# Altium PCB 20K Control Board V1.1.PcbDoc (part 6 of 24)
Units mm, origin at the board's own origin, x right, y up, seen from the top; angles counter-clockwise.
Board outline 132 x 260 mm, 4 copper layers (Top Layer, GND, VCC, Bottom Layer); 1384 components, 779 nets, 4515 pads, 1774 vias.
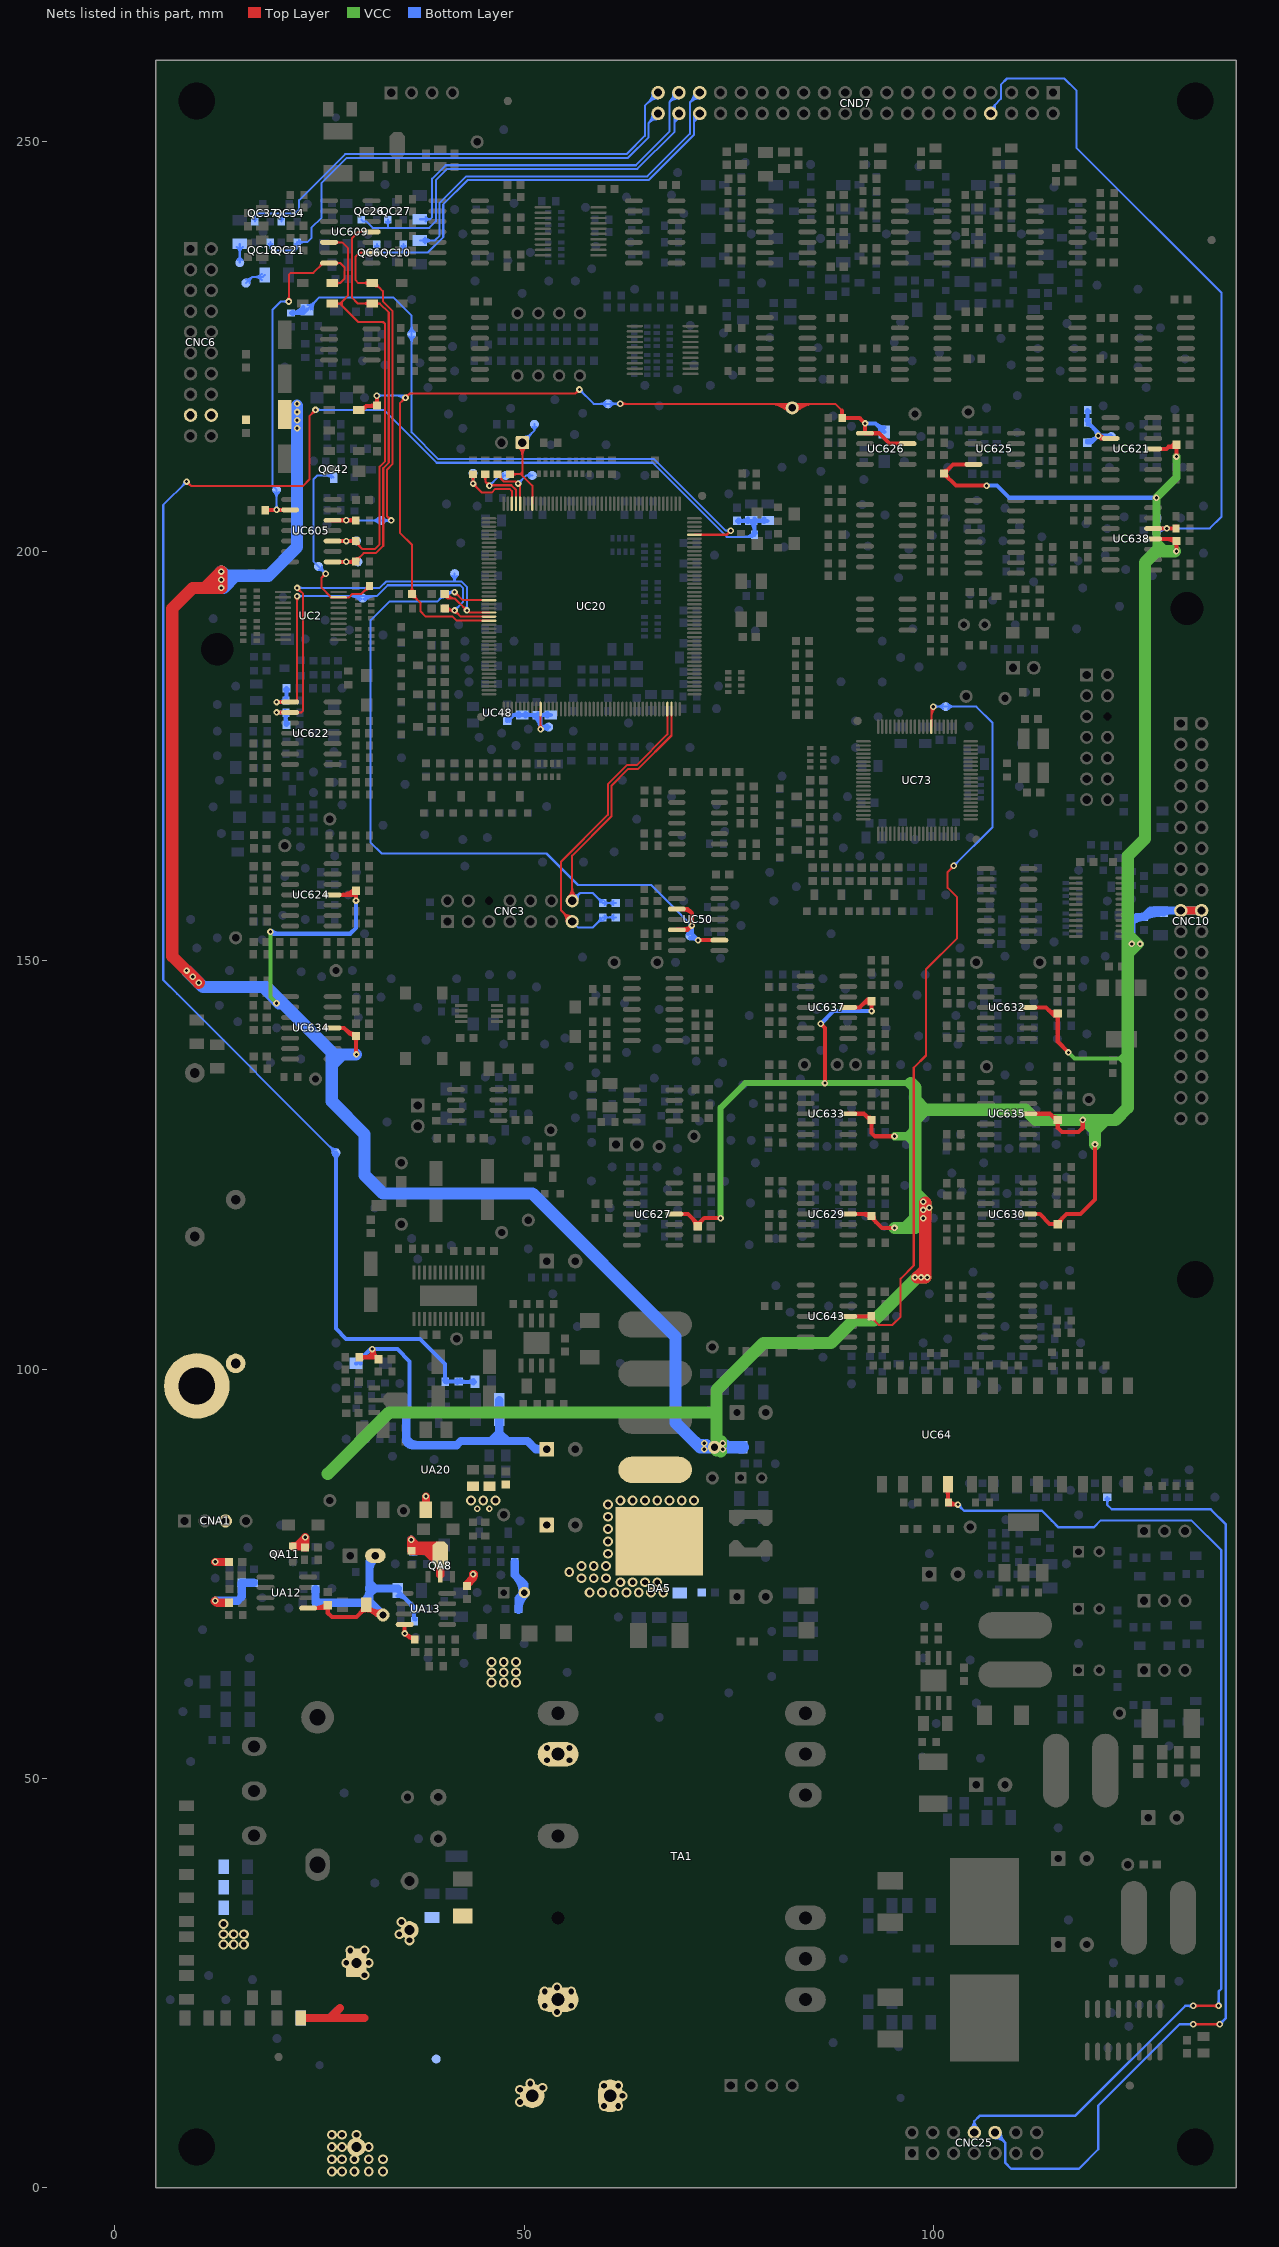
[diagram p8: the nets of this part, all layers, seen from the top]

## Via types
v1: diameter 0.8, hole 0.4, Top Layer to Bottom Layer, tented both sides, 1354 vias
v2: diameter 1.2, hole 0.7, Top Layer to Bottom Layer, 261 vias
v3: diameter 0.8, hole 0.4, Top Layer to Bottom Layer, 58 vias
v4: diameter 1.2, hole 0.7, Top Layer to Bottom Layer, tented top, 58 vias
v5: diameter 0.8, hole 0.4, Top Layer to Bottom Layer, tented top, 22 vias
v6: diameter 1.2, hole 0.7, Top Layer to Bottom Layer, tented both sides, 13 vias
v7: diameter 1.2, hole 0.7, Top Layer to Bottom Layer, tented bottom, 8 vias

## Nets (pads, with @x,y where several pads share a name; then routed paths per layer and width w, separated by ;. In a path a pad name is that pad's centre, name@x,y a point inside that pad or via, vN(x,y) a via of type N, cw(c..) or ccw(c..) an arc to the next point about the centre after c; other vN are vias at no path point) (continued)
+12V_FB: CA3.2 CA68.2 CA71.1 CA72.1 CA115.2 DA5.2 DA5.4 LA2.1 RA158.2 RA159.2 RA160.2 RA170.2 RA198.2 RA200.2 ZDA1.2 | length 61.6
  Top Layer w0.5: RA170.2@29.85,101.5 31.5,101.5 CA115.2@31.95,101.5 ; 31,101.5 31.45,101.95 v1(31.45,102.5) 31.45,102 31.45,101.7 ; 31.45,102 CA115.2@32.2,101.25 ; CA115.2@31.95,101.5 cw(c32.812,102.362) 31.599,102.485 ccw(c32.812,102.362) CA115.2@31.95,101.5 ; 31.275,101.775 ccw(c30.925,102.125) 31.328,102.413 cw(c30.925,102.125) 31.275,101.775
  Bottom Layer w0.5: ZDA1.2@29.45,100.75 29.5,100.75 31.25,102.5 v1(31.45,102.5) 34.5,102.5 36,101 RA159.2@36,94.65 ; ZDA1.2@29.55,101.2 ccw(c29.55,102.166) 30.233,101.483 ; ZDA1.2@30,100.75 cw(c31.207,100.75) 30.354,101.604 ; RA159.2@35.6,94.5 RA159.2@35.75,94.65 ; RA159.2@35.709,94.691 ccw(c35.005,95.395) 36,95.395 ; 30.853,102.103 cw(c31.45,101.505) 31.45,102.35 ccw(c31.45,101.505) 30.853,102.103
  Bottom Layer w1: RA160.2@35.551,91.443 ccw(c36.35,91.558) 36.35,90.75 RA160.2@35.6,91.5 ; RA160.2@35.565,91.415 ccw(c37.169,93.019) 37.169,90.75 ; RA160.2@35.6,91.25 RA158.2@35.6,93 RA159.2@35.6,94.5 ; 36.6,90.75 41.75,90.75 42.25,91.25 50.412,91.25 51.412,90.25 CA72.1@52.75,90.25 ; 45.95,91.25 46.95,92.25 ; 46.95,91.56 46.95,92.25 ; RA198.2@46.95,96.25 RA200.2@46.95,94 46.95,92.25 ; 47.95,91.25 46.95,92.25 ; 51.081,90.581 ccw(c51.799,91.299) CA72.1@52.481,90.546 ; CA72.1@52.467,89.967 ccw(c51.784,89.284) 51.784,90.25 ccw(c51.784,91.216) CA72.1@52.467,90.533
  other v2: 58,72.75 59.5,72.75 61,72.75 62.5,72.75 64,72.75 65.5,72.75 67,72.75 61.75,74 63.25,74 64.75,74 66.25,74 57,74.5 58.5,74.5 60,74.5 57,76 58.5,76 60,76 61.75,84 63.25,84 64.75,84 66.25,84 67.75,84 69.25,84 70.75,84
  other v4: 55.5,75.25 60.25,77.5 60.25,79 60.25,80.5 60.25,82 60.25,83.5
-12V: -12V.1 CC8.1 CC15.1 CC17.1 CC20.1 CC62.1 CC72.2 CC76.1 CC88.1 CC90.2 CC177.1 CC276.1 CC280.1 CC319.1 CC322.2 CC323.1 CNA1.3 CNC6.17 CNC6.18 CNC10.19 CNC10.20 EC6.2 LA7.2 UC621.11 UC624.11 UC625.4 UC627.11 UC629.11 UC630.11 UC632.11 UC633.11 UC634.11 UC635.11 UC637.11 UC638.11 | length 755
  Top Layer w0.5: UC634.11@26.6,141.75 28,141.75 28.75,141 ; UC624.11@26.6,158 28.95,158 CC17.1@29.45,158.5 v1(29.45,157.3) ; UC624.11@27.639,158 ccw(c27.639,160.311) CC17.1@29.273,158.677 ; 28.255,141.495 ccw(c29.45,142.69) CC90.2@29.45,141 ; 28.846,158 ccw(c28.846,159.104) 29.627,158.323 ccw(c30.054,157.896) 29.45,157.896 ccw(c28.846,157.896) CC17.1@29.273,158.323 ; CC90.2@29.214,140.669 ccw(c28.75,140.51) 28.75,141 ; CC90.2@29.25,141 28.75,141 ; CC90.2@29.273,140.573 cw(c28.846,140.146) 29.45,140.146 cw(c30.054,140.146) CC90.2@29.627,140.573 ; v1@29.45,138.55 CC90.2@29.45,140.75 ; 29.45,138.983 ccw(c29.983,138.983) v1@29.606,138.606 ; UC627.11@68.35,119 70,119 CC8.1@71.25,117.75 ; 70.561,118.439 cw(c69.622,117.5) CC8.1@70.95,117.5 ; CC8.1@71.2,117.5 71.2,117.7 72,118.5 v1(74,118.5) ; CC8.1@71.45,117.5 cw(c72.536,117.5) 71.768,118.268 ; v1(86.25,142.25) 86.75,141.75 v1@86.75,135.25 ; UC629.11@89.6,119 92.2,119 CC88.1@92.45,118.75 92.45,118.55 93.7,117.3 v1(95.25,117.3) ; UC633.11@89.6,131.25 91.5,131.25 92.25,130.5 CC72.2@92.45,130.5 ; UC637.11@89.6,144.25 91,144.25 91.75,145 CC177.1@92.45,145 v1(92.45,143.8) ; 91.243,119 cw(c91.243,117.543) CC88.1@92.273,118.573 ; 91.4,144.65 cw(c91.952,144.098) CC177.1@92.329,144.781 ; 91.682,131.068 ccw(c92.45,131.836) CC72.2@92.45,130.75 ; 91.682,144.932 cw(c92.45,144.164) CC177.1@92.45,145.25 ; 91.87,145.12 cw(c92.286,144.703) CC177.1@92.571,145.219 ; CC72.2@92.273,130.323 cw(c91.846,129.896) 92.45,129.896 cw(c93.054,129.896) CC72.2@92.627,130.323 ; CC177.1@92.273,145.177 cw(c91.846,145.604) 91.846,145 cw(c91.846,144.396) 92.273,144.823 cw(c91.846,144.396) 92.45,144.396 cw(c93.054,144.396) CC177.1@92.627,144.823 ; CC72.2@92.45,130.3 CC72.2@92.45,130.5 ; CC88.1@92.7,118.75 ccw(c93.786,118.75) 93.018,117.982 ; v1(95.25,128.5) 92.85,128.5 92.45,128.9 CC72.2@92.45,130.5 ; CC76.1@101.3,209.25 cw(c101.3,208.767) CC76.1@101.641,209.109 ; CC76.1@101.3,209.75 ccw(c101.3,210.354) 101.727,209.927 ccw(c102.154,209.5) 101.55,209.5 ccw(c102.274,209.5) 101.762,208.988 ; UC625.4@104.9,210.595 102.395,210.595 CC76.1@101.3,209.5 101.3,209.45 102.75,208 v1(106.5,208) ; UC630.11@111.6,119 113,119 114.2,117.8 CC62.1@115.2,117.8 ; UC635.11@111.6,131.25 114.25,131.25 CC15.1@115,130.5 ; UC632.11@111.6,144.25 113.75,144.25 114.5,143.5 CC20.1@115.2,143.5 115.2,140.05 v1(116.5,138.75) ; 114.1,143.9 ccw(c114.721,144.52) CC20.1@115.094,143.726 ; 114.432,131.068 ccw(c115.2,131.836) CC15.1@115.2,130.75 ; 114.476,117.8 cw(c114.476,117.026) CC62.1@115.023,117.573 ; 114.603,143.397 ccw(c115.042,143.836) CC20.1@115.306,143.274 ; CC15.1@115,130.25 CC15.1@115.2,130.25 ; CC15.1@115.023,130.323 cw(c114.596,129.896) 115.2,129.896 cw(c115.804,129.896) CC15.1@115.377,130.323 ; CC20.1@115.023,143.677 cw(c114.596,144.104) 114.596,143.5 cw(c114.596,142.896) 115.023,143.323 cw(c114.596,142.896) 115.2,142.896 cw(c115.804,142.896) CC20.1@115.377,143.323 ; CC62.1@115.2,117.75 CC62.1@115.2,117.8 ; CC15.1@115.2,130.5 CC15.1@115.2,130.25 ; CC62.1@115.225,117.775 CC62.1@115.2,117.8 ; CC62.1@115.45,117.75 cw(c116.504,117.75) 115.759,118.495 ; v1(118.25,130.5) 118.25,129.5 117.75,129 115.7,129 115.2,129.5 CC15.1@115.2,130.25 ; v1(119.75,127.5) 119.75,120.75 118,119 116.264,119 115.2,117.936 CC62.1@115.2,117.8 ; UC621.11@126.6,212.5 UC621.11@126.85,212.5 128.5,212.5 128.75,212.75 ; UC638.11@126.85,201.5 129.7,201.5 v1(129.7,200) ; 128.493,201.5 cw(c128.493,200.043) 129.523,201.073 cw(c129.096,200.646) 129.7,200.646 cw(c130.304,200.646) CC280.1@129.877,201.073 ; CC276.1@129.494,213.142 cw(c128.75,213.652) 128.75,212.75 ; CC276.1@129.523,212.823 cw(c129.096,212.396) 129.7,212.396 cw(c130.304,212.396) CC276.1@129.877,212.823 ; v1(129.7,211.55) CC276.1@129.7,213 ; CC276.1@129.7,212.75 128.75,212.75
  Top Layer w1: CNC10.19@130.23,156.07 CNC10.20@132.77,156.07
  Top Layer w1.5: v1(10.25,147.25) 7,150.5 7,193 9.5,195.5 v1(13,195.5) v1(13,197.5) ; 11,195.5 v1(13,197.5) ; 11.89,196.39 cw(c13,195.281) v1@13,196.85 ; 12,195.5 v1(13,196.5) ; v1@12.654,196.448 cw(c13.869,196.631) v1(13,197.5) ; v1@98,111.25 99,111.25 99,112.25 ; v1@98.084,111.334 99,112.25 ; v1@99,120.4 99,112.25
  VCC w0.5: v1(19,153.5) 19,145.5 v1(19.735,144.765) ; v1(116.5,138.75) 117.25,138 122.75,138 ; 123.5,137.25 122.75,138 ; 123.5,138.75 122.75,138 ; 123.75,138 122.75,138
  VCC w0.75: v1(74,118.5) 74,132 77,135 v1(86.75,135) 97.25,135
  VCC w1: v1(95.25,128.5) 96.75,128.5 ; 97.8,127.45 96.75,128.5 ; 97.8,128.5 96.75,128.5 ; 97.8,129.55 96.75,128.5 ; 123.714,153.536 cw(c122.177,152) v1@124.35,152 ; 123.75,153.5 v1(125.25,152) ; 124,150.75 v1(125.25,152) ; v1@124.191,151.919 ccw(c124.673,152.577) v1(125.25,152) ; v1(124.25,152) v1(125.25,152) ; 127.25,200.5 v1(127.25,206.525) 129.7,208.975 v1(129.7,211.55) ; 127.35,201.1 128.45,200
  VCC w1.5: 26,87.25 33.5,94.75 73.5,94.75 ; -12V.1@73.5,90.099 cw(c75.066,90.099) v1@74.015,91.26 ; -12V.1@73.5,90.5 73.5,94.75 ; -12V.1@73.5,91.216 ccw(c75.216,91.216) v1@74.003,90.003 ; 73.5,91.966 ccw(c75.216,91.966) -12V.1@74.003,90.753 ; v1(95.25,117.3) 96.6,117.3 ; 97.25,135 97.8,134.45 97.8,131.75 ; 97.8,117.55 cw(c99.202,117.55) v1@98.6,118.816 ; 97.8,118.121 cw(c100.036,118.121) v1@98.511,119.756 ; 97.8,119.051 cw(c100.199,119.051) v1@98.503,120.747 ; 97.8,119.949 ccw(c100.199,119.949) v1@98.503,118.253 ; 97.8,120.949 ccw(c100.199,120.949) v1@98.503,119.253 ; 97.8,130.55 99,131.75 ; 97.8,132.95 99,131.75 ; 98.464,117.964 ccw(c96.927,119.5) 99.1,119.5 ccw(c97.169,119.5) 98.534,120.866 ; v1@98.561,120.206 cw(c99.458,121.6) 97.8,121.6 ; v1@99,111.25 98,111.25 92.75,106 90.25,106 87.5,103.25 79.25,103.25 73.5,97.5 73.5,94.75 ; v1@118.5,130.5 119.75,129.25 ; v1(119.75,127.5) 119.75,129.25 ; 119.75,130.25 119.75,129.25 ; 121,130.5 119.75,129.25 ; 123.75,151.638 cw(c124.612,151.638) v1@124.003,152.247 ; 123.75,152.362 ccw(c124.612,152.362) v1@124.003,151.753 ; v1@129.5,200 127.25,200 125.85,198.6 125.85,164.85 123.75,162.75 123.75,153.5 123.75,132 122.25,130.5 v1(118.25,130.5) 112.5,130.5 111.25,131.75 99,131.75 ; 96.6,117.3 97.8,117.3 99,118.5 99,120.4 97.8,121.6 ; 96.6,117.3 97.8,118.5 97.8,121.6 ; 97.8,121.6 97.8,128.5 97.8,131.75 ; 97.8,131.75 99,131.75 ; 97.726,118.426 cw(c98.75,117.402) 98.75,118.85 ccw(c98.75,117.402) 97.726,118.426
  Bottom Layer w0.5: v1(19,153.5) 19.25,153.25 28.75,153.25 29.45,153.95 v1(29.45,157.3) ; v1@19.106,153.606 ccw(c19.966,154.466) 19.966,153.25 ; v1(86.25,142.25) 87.8,143.8 v1(92.45,143.8) ; v1(106.5,208) 107.75,208 109.225,206.525 v1(127.25,206.525)
  Bottom Layer w1: 17.75,146.75 19,145.5 ; v1(19.735,144.765) 19,145.5 ; v1@20,144.5 19,145.5 ; 124.128,154.628 cw(c125.75,153.006) CC323.1@125.75,155.3 ; v1@124.2,152 124.2,152.75 ; v1(124.25,152) v1@124.95,152 ; 124.325,154.825 cw(c125.512,153.638) CC323.1@125.75,155.3 ; v1(125.25,152) v1@124.95,152 ; CC323.1@125.933,155.361 cw(c127.5,152.782) CC322.2@127.5,155.8 ; CC323.1@125.97,155.52 cw(c126.924,154.566) CC322.2@127.442,155.812 ; 126.848,156.07 cw(c126.848,155.298) CC322.2@127.394,155.844 ; CC322.2@127.609,156.07 ccw(c127.609,153.441) CC323.1@125.75,155.3 ; CC322.2@128.106,155.844 cw(c128.652,155.298) 128.652,156.07 ; CNC10.20@132.77,156.07 CNC10.19@130.23,156.07 126.52,156.07 CC323.1@125.75,155.3 ; 124.2,152.75 124.2,154.7 124.8,155.3 CC323.1@125.75,155.3 ; 124.2,152.75 v1@124.95,152
  Bottom Layer w1.5: v1(8.75,148.75) 10.75,146.75 18.5,146.75 26.75,138.5 27.75,138.5 ; v1@12.948,196.846 cw(c13.131,195.631) 14,196.5 ; v1(13,195.5) v1(13,197.5) 13.5,197 ; v1@13,196.15 ccw(c13,198.323) 14.536,196.786 ; v1(13,196.5) 13,196.75 13.25,197 14.75,197 ; v1@13.25,195.5 14.75,197 ; v1@19.735,145.115 cw(c19.735,144.149) 20.418,144.832 ; 19.803,145.447 cw(c19.12,144.765) v1@20.085,144.765 ; v1@22.25,217.75 v1(22.25,215) 22.25,200.5 18.75,197 14.75,197 ; 26.5,137.25 27.75,138.5 ; 26.5,138.5 26.5,132.75 30.5,128.75 30.5,123.75 32.75,121.5 51,121.5 68.5,104 68.5,93.5 71.5,90.5 LA7.2@76.734,90.5 ; v1@29.45,138.5 27.75,138.5 ; 70.89,91.11 ccw(c72,92.219) v1@72,90.65 ; 71,91 ccw(c71.869,91.869) v1@72.052,90.654 ; 71.638,90.5 ccw(c71.638,91.362) v1@72.247,90.753 ; v1@71.753,90.753 ccw(c72.362,91.362) 72.362,90.5 ; -12V.1@73.888,90.5 ccw(c73.888,91.362) v1@74.497,90.753 ; -12V.1@74.003,90.753 ccw(c74.612,91.362) 74.612,90.5
  other v1: 72,90.25 74.25,90.25 72,91 74.25,91 97.75,111.25 98.5,111.25 99.25,111.25 98.75,118.5 98.75,119.5 99.5,119.75 98.75,120.5 29.5,138.5 9.5,148 22.25,216 22.25,217 22.25,218
ADCREF2048: CC138.2 CC147.2 CC301.1 pad.ICT@53,178.5 UC20.54 UC48.2 | length 24.7
  Top Layer w0.25: v1@51.806,178.444 ccw(c51.336,178.914) 52,178.914 ccw(c52.664,178.914) v1@52.194,178.444 ; v1(52,178.25) UC20.54@52,180.7
  Bottom Layer w0.5: UC48.2@47.925,179.25 48.675,180 CC138.2@49.75,180 ; UC48.2@47.925,179.5 ccw(c47.925,180.104) 48.352,179.677 ccw(c48.779,179.25) UC48.2@48.175,179.25 ; CC138.2@49.25,180 CC138.2@49.75,180 ; CC138.2@49.338,179.788 ccw(c48.826,179.276) 48.826,180 ccw(c48.826,180.724) CC138.2@49.338,180.212 ; CC138.2@50.162,179.788 cw(c50.674,179.276) 50.674,180 cw(c50.674,180.724) CC138.2@50.162,180.212 ; 50.776,180 cw(c50.776,179.226) CC301.1@51.323,179.773 ; CC301.1@51.326,179.771 cw(c49.782,178.178) v1@52,178.178 ; CC301.1@51.674,180.129 cw(c50.927,179.359) 52,179.359 ; v1(52,178.25) CC301.1@52,179.75 ; CC301.1@52,180 CC147.2@52.75,180 ; v1@52.106,178.144 cw(c52.966,177.284) pad.ICT@52.966,178.5 ; v1@52.25,178.5 pad.ICT@53,178.5 ; pad.ICT@52.788,178.288 ccw(c52.276,177.776) 52.276,178.5 ccw(c52.276,179.224) pad.ICT@52.788,178.712 ; CC147.2@53.25,180 CC138.2@49.75,180 ; 52.326,180 ccw(c52.326,180.724) 52.838,180.212 cw(c52.326,180.724) 52.326,180 ; 52.326,180 cw(c52.326,179.276) 52.838,179.788 ccw(c52.326,179.276) 52.326,180 ; CC301.1@51.677,179.773 cw(c52.224,179.226) 52.224,180 ccw(c52.224,179.226) CC301.1@51.677,179.773
AUX.SHUT: CA121.2 CA122.2 CC248.2 CC249.2 CC349.2 pad.ICT@27,126.5 RA187.1 RC381.1 | length 245
  Top Layer w0.25: v1@8.75,208.225 cw(c8.75,207.561) 9.219,208.031 cw(c9.689,208.5) v1@9.025,208.5 ; v1(8.75,208.5) 9.3,207.95 22.95,207.95 23.75,208.75 23.75,216.5 v1(24.5,217.25) ; v1@24.225,217.25 cw(c23.561,217.25) 24.031,216.781 cw(c24.5,216.311) v1@24.5,216.975
  Bottom Layer w0.25: 6.25,147.25 7.608,145.892 ; v1@8.475,208.5 cw(c7.811,208.5) 8.281,208.031 cw(c8.75,207.561) v1@8.75,208.225 ; v1(8.75,208.5) 5.9,205.65 5.9,147.6 7.608,145.892 ; v1(24.5,217.25) 32.864,217.25 39.314,210.8 65.7,210.8 74.75,201.75 77.9,201.75 RC381.1@78.15,202 ; v1@24.694,217.056 cw(c25.164,216.586) 25.164,217.25 cw(c25.164,217.914) v1@24.694,217.444 ; pad.ICT@26.575,126.5 ccw(c25.549,126.5) 26.274,127.226 ccw(c27,127.951) pad.ICT@27,126.925 ; pad.ICT@27,126.5 7.608,145.892 ; 76.883,201.75 ccw(c76.883,203.217) RC381.1@77.92,202.18 ; 77.486,201.75 ccw(c77.486,202.614) RC381.1@78.097,202.003 ; CC248.2@79.7,203.75 CC248.2@79.75,203.75
  Bottom Layer w0.5: pad.ICT@26.788,126.288 cw(c26.276,125.776) 27,125.776 cw(c27.724,125.776) pad.ICT@27.212,126.288 ; pad.ICT@27,126.5 27,105 28.25,103.75 37.25,103.75 40.35,100.65 RA187.1@40.35,98.5 ; RA187.1@40.209,98.691 ccw(c39.867,99.033) 40.35,99.033 ccw(c40.833,99.033) 40.491,98.691 ccw(c40.833,99.033) 40.833,98.55 ccw(c40.833,98.067) RA187.1@40.491,98.409 ; RA187.1@40.4,98.55 CA122.2@42,98.55 ; CA122.2@41.823,98.373 ccw(c41.396,97.946) 41.396,98.55 ccw(c41.396,99.154) CA122.2@41.823,98.727 ; CA122.2@42.05,98.5 CA121.2@44,98.5 ; CA122.2@42.177,98.727 ccw(c42.724,99.274) 42.724,98.5 ; CA121.2@43.788,98.288 ccw(c43.276,97.776) 43.276,98.5 ccw(c43.276,99.224) CA121.2@43.788,98.712 ; CC249.2@76,203.7 CC248.2@79.7,203.7 ; CC249.2@76.177,203.523 cw(c76.604,203.096) 76.604,203.7 cw(c76.604,204.304) CC249.2@76.177,203.877 ; 76.705,203.7 ccw(c76.705,204.595) CC349.2@77.338,203.962 ; 76.946,203.7 cw(c76.946,203.146) CC349.2@77.338,203.538 ; CC349.2@77.738,203.538 cw(c76.743,202.543) 78.15,202.543 ; RC381.1@78.009,202.191 ccw(c77.667,202.533) 78.15,202.533 ccw(c78.633,202.533) RC381.1@78.291,202.191 ; RC381.1@78.15,202 CC349.2@78.15,203.35 ; CC349.2@78.162,203.538 cw(c78.554,203.146) 78.554,203.7 ; CC349.2@78.162,203.962 ccw(c78.795,204.595) 78.795,203.7 ; 78.705,203.7 ccw(c78.705,204.595) CC248.2@79.338,203.962 ; 78.946,203.7 cw(c78.946,203.146) CC248.2@79.338,203.538
AUX_OK: DC32.1 pad.ICT@36.25,226.5 RC337.1 UC20.128 | length 90.5
  Top Layer w0.25: UC20.128@70.8,202 74.75,202 v1@75,202.25 ; v1@74.975,202.5 cw(c74.311,202.5) 74.781,202.031 cw(c75.25,201.561) v1@75.25,202.225
  Bottom Layer w0.25: DC32.1@23.45,229.5 24.95,231 34,231 36.25,228.75 36.25,222 36.25,214.5 39.5,211.25 65.886,211.25 74.636,202.5 ; DC32.1@23.55,230.075 ccw(c23.55,231.222) 24.361,230.411 ; DC32.1@23.875,229.5 cw(c24.901,229.5) 24.176,230.226 ; DC32.1@24.125,229.5 cw(c25.755,229.5) 24.602,230.652 ; pad.ICT@35.949,226.199 cw(c35.224,225.474) 36.25,225.474 cw(c37.276,225.474) pad.ICT@36.551,226.199 ; pad.ICT@35.949,226.801 ccw(c35.224,227.526) 36.25,227.526 ccw(c37.276,227.526) pad.ICT@36.551,226.801 ; v1@75.045,202.317 ccw(c74.636,201.953) 74.636,202.5 ; v1@75.045,202.683 cw(c74.636,203.047) 74.636,202.5 ; v1(75.25,202.5) 74.636,202.5
  Bottom Layer w0.5: RC337.1@21.691,228.959 cw(c22.033,228.617) 22.033,229.1 cw(c22.033,229.583) RC337.1@21.691,229.241 ; 22.588,229.1 ccw(c22.588,230.154) DC32.1@23.388,229.467 ; DC32.1@23.009,229.793 cw(c21.5,231.088) RC337.1@21.5,229.1 23.05,229.1 DC32.1@23.45,229.5
BO1QN_A: CND7.40 QC18.2 QC21.2 | length 67.6
  Bottom Layer w0.25: QC18.2@18.777,237.504 cw(c18.32,237) 19,237 ; QC18.2@19,237.75 19,237 ; QC18.2@19.223,237.504 ccw(c19.68,237) 19,237 ; QC21.2@22.027,237.504 cw(c21.57,237) 22.25,237 ; QC21.2@22.473,237.504 ccw(c22.93,237) 22.25,237 ; QC21.2@22.485,237.515 cw(c23.052,236.948) 23.052,237.75 cw(c23.052,238.552) QC21.2@22.485,237.985 ; CND7.40@65.67,253.469 cw(c64.072,253.442) 65.202,252.312 ; CND7.40@65.92,253.473 cw(c64.892,253.456) 65.619,252.729 cw(c66.346,252.002) CND7.40@66.363,253.03 ; CND7.40@66.359,252.78 ccw(c66.332,251.182) 65.202,252.312 ; CND7.40@66.37,253.48 65.202,252.312 ; 19,237 19.25,236.75 22,236.75 22.25,237 ; 22.25,237 QC21.2@22.25,237.75 23.5,237.75 24,238.25 24,239.5 25.25,240.75 25.25,245 28.3,248.05 62.686,248.05 65.202,250.566 65.202,252.312
BO1QN_K: pad.ICT@16,232.75 RC369.2 | length 6.3
  Bottom Layer w0.254: pad.ICT@16,232.75 16.75,233.5 18.05,233.5 RC369.2@18.3,233.75 ; pad.ICT@16,233.173 ccw(c16,234.194) 16.722,233.472 ccw(c17.444,232.75) pad.ICT@16.423,232.75 ; RC369.2@17.93,233.13 ccw(c17.037,232.237) 17.037,233.5 ccw(c17.037,234.763) RC369.2@17.93,233.87
BO1QP_A: CND7.36 QC6.2 QC10.2 | length 56.8
  Bottom Layer w0.25: QC6.2@31.777,237.254 cw(c31.32,236.75) 32,236.75 ; QC6.2@32,237.5 32,236.75 ; QC6.2@32.223,237.254 ccw(c32.68,236.75) 32,236.75 ; QC10.2@35.027,237.254 cw(c34.57,236.75) 35.25,236.75 ; QC10.2@35.25,237.5 35.25,236.75 ; QC10.2@35.473,237.254 ccw(c35.93,236.75) 35.25,236.75 ; CND7.36@70.98,253.48 70.75,253.25 70.75,252.499 ; CND7.36@71.45,252.95 CND7.36@71.45,253.48 70.75,252.78 70.75,252.499 ; CND7.36@71.5,253.249 70.75,252.499 ; 32,236.75 32.25,236.5 35,236.5 ; 35,236.5 38.25,236.5 40.11,238.36 40.11,242.36 43.1,245.35 65.236,245.35 70.75,250.864 70.75,252.499 ; 35,236.5 35.25,236.75
BO1QP_K: CND7.35 RC354.2 | length 53.7
  Bottom Layer w0.25: RC354.2@37.25,237.95 39.064,237.95 39.66,238.547 39.66,242.547 42.914,245.8 65.05,245.8 70.25,251 70.25,254.82 CND7.35@71.45,256.02 ; RC354.2@37.694,237.756 cw(c38.164,237.286) 38.164,237.95 cw(c38.164,238.614) RC354.2@37.694,238.144 ; RC354.2@37.871,237.579 cw(c38.767,236.683) 38.767,237.95 cw(c38.767,239.217) RC354.2@37.871,238.321 ; CND7.35@70.75,256.02 cw(c69.06,256.02) 70.255,254.825 cw(c71.45,253.63) CND7.35@71.45,255.32 ; CND7.35@71,256.02 cw(c69.914,256.02) 70.682,255.252 cw(c71.45,254.484) CND7.35@71.45,255.57
BO2QN_A: CND7.39 QC34.2 QC37.2 | length 66.8
  Bottom Layer w0.25: QC37.2@16.921,240.533 ccw(c16.728,240.845) 17.095,240.845 ; QC37.2@17.095,240.25 17.095,240.845 ; QC37.2@17.269,240.533 cw(c17.462,240.845) 17.095,240.845 ; QC34.2@20.149,240.518 ccw(c19.865,240.905) 20.345,240.905 ccw(c20.825,240.905) QC34.2@20.541,240.518 ; QC34.2@20.345,240.25 20.345,240.905 ; 20.345,241.155 20.345,240.905 ; CND7.39@65.67,256.02 cw(c63.98,256.02) 65.175,254.825 cw(c66.37,253.63) CND7.39@66.37,255.32 ; CND7.39@65.92,256.02 cw(c64.834,256.02) 65.602,255.252 cw(c66.37,254.484) CND7.39@66.37,255.57 ; CND7.39@66.37,256.02 64.75,254.4 64.75,250.75 62.5,248.5 28.114,248.5 22.5,242.886 22.5,241.782 21.968,241.25 20.69,241.25 ; 17.095,240.845 17.5,241.25 20,241.25 ; 20,241.25 20.345,240.905 ; 20,241.25 20.69,241.25 ; 20.345,240.905 20.69,241.25
BO2QN_K: pad.ICT@15.25,235.25 RC390.2 | length 5.9
  Bottom Layer w0.254: RC390.2@14.88,237.18 cw(c13.987,236.287) 15.25,236.287 cw(c16.513,236.287) RC390.2@15.62,237.18 ; pad.ICT@14.951,235.549 ccw(c14.229,236.271) 15.25,236.271 ccw(c16.271,236.271) pad.ICT@15.549,235.549 ; pad.ICT@15.25,235.25 RC390.2@15.25,237.55
BO2QP_A: CND7.38 QC26.2 QC27.2 | length 53.3
  Bottom Layer w0.25: QC26.2@30.095,240.5 30.345,240.25 30.75,240.25 31.5,239.5 38.409,239.5 39.2,240.291 39.2,245.314 40.586,246.7 63.836,246.7 68.341,251.204 68.341,251.999 ; QC27.2@33.11,240.265 cw(c32.543,239.698) 33.345,239.698 cw(c34.147,239.698) QC27.2@33.58,240.265 ; 33.345,239.595 QC27.2@33.345,240.5 ; CND7.38@68.91,252.91 68.341,252.341 68.341,251.999 ; CND7.38@68.91,253.48 68.341,252.911 68.341,252.499 ; CND7.38@69.091,253.25 68.341,252.499 ; 68.341,251.999 68.341,252.499
BO2QP_K: CND7.37 RC379.2 | length 48.4
  Bottom Layer w0.25: RC379.2@37.25,240.55 38.5,240.55 ; RC379.2@37.932,240.252 cw(c38.5,239.86) 38.5,240.55 ; RC379.2@37.932,240.848 ccw(c38.5,241.24) 38.5,240.55 ; CND7.37@68.21,256.005 cw(c66.638,255.972) 67.75,254.86 ; CND7.37@68.46,256.01 cw(c67.45,255.989) 68.164,255.274 cw(c68.879,254.56) CND7.37@68.9,255.57 ; CND7.37@68.895,255.32 ccw(c68.862,253.748) 67.75,254.86 ; CND7.37@68.91,256.02 67.75,254.86 ; 38.5,240.55 38.75,240.8 38.75,245.5 40.4,247.15 63.65,247.15 67.75,251.25 67.75,254.86
BOOST1_QN: DC39.1 pad.ICT@29.5,201.25 RC299.1 UC605.10 UC609.5 | length 57.9
  Top Layer w0.25: UC609.5@26.15,237.73 27.77,237.73 28.5,237 28.5,231.25 27.75,230.5 ; DC39.1@26.55,230.25 27.5,230.25 ; DC39.1@27.05,230.025 cw(c27.5,229.688) 27.5,230.25 ; DC39.1@27.05,230.475 ccw(c27.5,230.812) 27.5,230.25 ; UC609.5@27.074,237.606 cw(c27.372,237.308) 27.372,237.73 cw(c27.372,238.152) UC609.5@27.074,237.854 ; 27.75,230 27.75,230.5 ; RC299.1@29.4,200.875 cw(c29.4,200.332) 29.784,200.716 ; RC299.1@29.4,201.1 30.25,200.25 31.75,200.25 32.333,200.833 32.333,210.333 33,211 33,227.75 ; RC299.1@29.725,201.2 ccw(c30.751,201.2) 30.026,200.474 ; 33,227.25 33,227.75 ; 27.5,230.25 29.75,228 32.75,228 33,227.75 ; 27.5,230.25 27.75,230.5
  Top Layer w0.5: UC605.10@26.6,201.23 v1(28.25,201.23) RC299.1@29.4,201.23 ; 28.869,201.23 ccw(c28.869,201.781) RC299.1@29.259,201.391
  Bottom Layer w0.5: v1@28.27,201.25 pad.ICT@29.5,201.25 ; v1@28.356,201.124 cw(c28.66,200.82) 28.66,201.25 ; pad.ICT@29.288,201.038 ccw(c28.776,200.526) 28.776,201.25 ccw(c28.776,201.974) pad.ICT@29.288,201.462
BOOST1_QP: DC36.1 pad.ICT@29.69,198.69 RC295.1 UC605.8 UC609.11 | length 58.6
  Top Layer w0.25: RC295.1@29.34,198.69 30.4,199.75 31.886,199.75 32.783,200.646 32.783,210.146 33.45,210.814 33.45,227.75 33.45,227.936 33.45,229.164 32.364,230.25 ; RC295.1@29.4,199.125 ccw(c29.4,200.03) 30.04,199.39 ; RC295.1@29.725,198.8 cw(c30.389,198.8) 29.919,199.269 ; UC609.11@30.426,238.876 ccw(c30.128,238.578) 30.128,239 ccw(c30.128,239.422) UC609.11@30.426,239.124 ; DC36.1@30.985,229.985 ccw(c30.345,229.345) 30.345,230.25 ccw(c30.345,231.155) DC36.1@30.985,230.515 ; UC609.11@31.35,239 29.75,239 28.95,238.2 28.95,231 29.7,230.25 DC36.1@31.45,230.25 32.364,230.25 ; DC36.1@31.959,230.037 cw(c32.364,229.759) 32.364,230.25 ; DC36.1@31.959,230.463 ccw(c32.364,230.741) 32.364,230.25
  Top Layer w0.5: UC605.8@26.6,198.69 v1(28.25,198.69) RC295.1@29.34,198.69 ; 28.893,198.69 ccw(c28.893,199.207) RC295.1@29.259,198.841 ; 28.941,198.69 cw(c28.941,198.241) RC295.1@29.259,198.559
  Bottom Layer w0.5: v1(28.25,198.69) pad.ICT@29.69,198.69 ; pad.ICT@29.478,198.478 ccw(c28.966,197.966) 28.966,198.69 ccw(c28.966,199.414) pad.ICT@29.478,198.902
BOOST1_TEMP: CC267.1 CND7.8 RC448.1 RC454.1 UC638.12 | length 91.2
  Top Layer w0.5: UC638.12@126.85,202.77 v1(128.5,202.77) 129.42,202.77 RC448.1@129.65,203 ; 129.119,202.77 cw(c129.119,202.219) RC448.1@129.509,202.609
  Bottom Layer w0.25: CND7.8@107.01,253.354 CND7.8@107.01,253.48 ; CND7.8@107.07,253.48 CND7.8@107.01,253.48 ; CND7.8@107.5,253.97 107.5,254.5 ; v1(128.5,202.77) 133.77,202.77 135.2,204.2 135.2,206.2 135.2,231.55 117.5,249.25 117.5,256.25 116,257.75 109,257.75 108.25,257 108.25,255.25 107.5,254.5 ; v1@128.694,202.576 cw(c129.164,202.106) 129.164,202.77 cw(c129.164,203.434) v1@128.694,202.964 ; CND7.8@107.01,253.48 107.01,254.01 107.5,254.5
  Bottom Layer w0.5: CC267.1@127.123,202.677 ccw(c126.576,203.224) 127.35,203.224 ; RC454.1@127.209,203.809 cw(c126.867,203.467) 127.35,203.467 cw(c127.833,203.467) RC454.1@127.491,203.809 ; CC267.1@127.3,202.5 CC267.1@127.35,202.55 ; RC454.1@127.35,204 CC267.1@127.35,202.55 ; CC267.1@127.482,202.329 cw(c128.5,201.375) v1(128.5,202.77) 127.57,202.77 CC267.1@127.35,202.55
BOOST2_QN: DC40.1 pad.ICT@19.75,207.5 RC307.1 UC605.2 UC609.7 | length 51.9
  Top Layer w0.25: RC307.1@18.35,205 RC307.1@18.35,205.04 ; v1@21.056,230.694 ccw(c20.586,231.164) 21.25,231.164 ccw(c21.914,231.164) v1@21.444,230.694 ; v1(21.25,230.5) 21.25,233.75 21.5,234 24.25,234 25.44,235.19 UC609.7@26.15,235.19 27.56,235.19 28.05,234.7 28.05,233.3 27.5,232.75 ; 24.988,234.738 ccw(c24.535,235.19) UC609.7@25.175,235.19 ; DC40.1@26.55,232.75 27.5,232.75 ; DC40.1@27.05,232.525 cw(c27.5,232.188) 27.5,232.75 ; DC40.1@27.05,232.975 ccw(c27.5,233.312) 27.5,232.75 ; UC609.7@27.074,235.066 cw(c27.372,234.768) 27.372,235.19 cw(c27.372,235.612) UC609.7@27.074,235.314
  Top Layer w0.5: RC307.1@18.35,205.04 v1(19.75,205.04) UC605.2@21.4,205.04 ; RC307.1@18.491,204.909 cw(c18.809,204.591) 18.809,205.04 ; RC307.1@18.491,205.191 ccw(c18.857,205.557) 18.857,205.04
  Bottom Layer w0.25: pad.ICT@19.449,207.199 cw(c18.724,206.474) 19.75,206.474 cw(c20.776,206.474) pad.ICT@20.051,207.199 ; v1@19.556,205.234 ccw(c19.086,205.704) 19.75,205.704 ccw(c20.414,205.704) v1@19.944,205.234 ; v1(19.75,205.04) pad.ICT@19.75,207.5 19.25,208 19.25,229.5 20.25,230.5 v1(21.25,230.5) ; v1@21.056,230.306 ccw(c20.586,229.836) 20.586,230.5 ccw(c20.586,231.164) v1@21.056,230.694
BOOST2_QP: DC31.1 pad.ICT@32.5,203.75 RC302.1 UC605.12 UC609.9 | length 56.2
  Top Layer w0.25: UC609.9@30.426,236.336 ccw(c30.128,236.038) 30.128,236.46 ccw(c30.128,236.882) UC609.9@30.426,236.584 ; DC31.1@30.985,232.485 ccw(c30.345,231.845) 30.345,232.75 ccw(c30.345,233.655) DC31.1@30.985,233.015 ; UC609.9@31.35,236.46 29.86,236.46 29.4,236 29.4,233.1 29.75,232.75 DC31.1@31.45,232.75 DC31.1@31.5,232.75 ; DC31.1@31.65,232.375 cw(c31.65,231.228) 32.461,232.039 ; DC31.1@31.75,232.75 32.725,231.775 32.725,230.525 33.9,229.35 33.9,210.627 33.233,209.96 33.233,204.267 v1(33.75,203.75) ; DC31.1@32.025,232.75 ccw(c32.689,232.75) 32.219,232.281 ; v1@33.475,203.75 ccw(c32.811,203.75) 33.281,204.219 ccw(c33.75,204.689) v1@33.75,204.025
  Top Layer w0.5: UC605.12@26.6,203.77 v1(28.25,203.77) RC302.1@29.38,203.77 ; 28.869,203.77 cw(c28.869,203.219) RC302.1@29.259,203.609
  Bottom Layer w0.25: v1@28.27,203.75 v1(33.75,203.75) ; v1@28.444,203.576 cw(c28.866,203.154) 28.866,203.75 ; v1@28.444,203.964 ccw(c28.962,204.482) 28.962,203.75 ; pad.ICT@32.199,203.449 ccw(c31.474,202.724) 31.474,203.75 ccw(c31.474,204.776) pad.ICT@32.199,204.051 ; pad.ICT@32.801,203.449 cw(c33.526,202.724) 33.526,203.75 cw(c33.526,204.776) pad.ICT@32.801,204.051 ; v1@33.556,203.556 ccw(c33.086,203.086) 33.086,203.75 ccw(c33.086,204.414) v1@33.556,203.944
BOOST2_TEMP: CC274.1 pad.ICT@121.75,214 RC471.1 RC472.1 UC621.3 | length 15.6
  Top Layer w0.5: v1(120.147,214.103) 120.48,213.77 UC621.3@121.65,213.77 ; v1@120.253,214.209 ccw(c121.314,215.27) UC621.3@121.314,213.77 ; v1@120.332,213.918 ccw(c120.659,214.245) UC621.3@120.831,213.816
  Bottom Layer w0.5: RC472.1@118.709,215.941 ccw(c118.367,216.283) 118.85,216.283 ccw(c119.333,216.283) RC472.1@118.991,215.941 ; RC471.1@118.709,217.059 cw(c118.367,216.717) 118.85,216.717 cw(c119.333,216.717) RC471.1@118.991,217.059 ; CC274.1@118.8,213.25 119.293,213.25 v1(120.147,214.103) ; CC274.1@118.8,213.5 ccw(c118.8,215.294) v1@120.069,214.026 ; RC472.1@118.85,215.5 cw(c118.85,214.896) RC472.1@119.277,215.323 ; RC471.1@118.85,217.25 RC472.1@118.85,215.75 120.147,214.453 v1(120.147,214.103) ; 119.643,214.957 cw(c118.789,214.103) v1@119.997,214.103 ; 120.776,214.103 cw(c120.776,213.026) pad.ICT@121.538,213.788 ; pad.ICT@121.75,214 121.647,214.103 v1(120.147,214.103)
BOOTMODE84: CNC2.1 pad.ICT@51.25,215.5 RC212.1 UC20.169 | length 24.6
  Top Layer w0.25: RC212.1@48.4,209.4 RC212.1@48.25,209.4 49.5,209.4 ; RC212.1@48.53,209.17 cw(c49.085,208.615) 49.085,209.4 cw(c49.085,210.185) RC212.1@48.53,209.63 ; CNC2.1@49.293,212.773 cw(c48.14,211.62) 49.77,211.62 cw(c51.4,211.62) CNC2.1@50.247,212.773 ; CNC2.1@49.469,212.949 cw(c48.744,212.224) 49.77,212.224 cw(c50.796,212.224) CNC2.1@50.071,212.949 ; 49.77,209.4 49.5,209.4 ; 49.77,209.67 49.5,209.4 ; CNC2.1@49.77,213.25 49.77,209.23 51,208 UC20.169@51,205.8 ; CNC2.1@49.885,213.135 CNC2.1@50,213.25 ; 49.968,209.032 49.6,209.4 49.5,209.4
  Bottom Layer w0.25: CNC2.1@49.77,213.25 51.25,214.73 ; CNC2.1@49.77,213.675 ccw(c49.77,214.701) 50.496,213.976 ccw(c51.221,213.25) CNC2.1@50.195,213.25 ; CNC2.1@49.77,213.925 ccw(c49.77,215.555) 50.922,214.402 ccw(c52.075,213.25) CNC2.1@50.445,213.25 ; CNC2.1@50.02,213.25 CNC2.1@50.27,213.5 ; pad.ICT@51.023,215.14 cw(c50.765,214.73) 51.25,214.73 ; pad.ICT@51.25,215.5 51.25,214.73 ; pad.ICT@51.477,215.14 ccw(c51.735,214.73) 51.25,214.73
BOOTMODE85: pad.ICT@51,209.25 RC214.1 UC20.172 | length 11.3
  Top Layer w0.25: RC214.1@46.75,209.4 46.75,209.25 47.5,208.5 47.75,208.5 49,208.5 v1(49.25,208.25) 49.5,208 UC20.172@49.5,205.8 ; RC214.1@46.8,209.075 cw(c46.8,208.773) RC214.1@47.013,208.987 ; RC214.1@46.875,209.393 ccw(c47.393,209.343) RC214.1@47.025,208.975 ; RC214.1@47.124,209.369 ccw(c48.078,209.278) 47.4,208.6
  Bottom Layer w0.25: v1(49.25,208.25) 50.25,209.25 ; v1@49.25,208.525 ccw(c49.25,209.189) 49.719,208.719 ccw(c50.189,208.25) v1@49.525,208.25 ; pad.ICT@50.635,209.032 ccw(c50.25,208.801) 50.25,209.25 ; pad.ICT@50.635,209.468 cw(c50.25,209.699) 50.25,209.25 ; pad.ICT@51,209.25 50.25,209.25
BOOTMODE86: pad.ICT@47.75,209.25 RC215.1 UC20.173 | length 13.5
  Top Layer w0.25: RC215.1@45.02,209.17 cw(c44.465,208.615) 45.25,208.615 cw(c46.035,208.615) RC215.1@45.48,209.17 ; RC215.1@45.34,209.4 45.25,209.31 45.25,208.5 45.7,208.05 48.425,208.05 49,207.475 UC20.173@49,205.8 ; v1@45.475,208 ccw(c44.811,208) 45.281,208.469 ccw(c45.75,208.939) v1@45.75,208.275
  Bottom Layer w0.25: v1(45.75,208) 47,209.25 pad.ICT@47.75,209.25 ; v1@45.75,208.275 ccw(c45.75,208.939) 46.219,208.469 ccw(c46.689,208) v1@46.025,208 ; pad.ICT@47.385,209.032 ccw(c47,208.801) 47,209.25 ccw(c47,209.699) pad.ICT@47.385,209.468
BOOTMODE87: pad.ICT@43.75,209.5 RC216.1 UC20.174 | length 15.7
  Top Layer w0.25: RC216.1@43.52,209.17 cw(c42.965,208.615) 43.75,208.615 cw(c44.535,208.615) RC216.1@43.98,209.17 ; v1@43.556,208.444 ccw(c43.086,208.914) 43.75,208.914 ccw(c44.414,208.914) v1@43.944,208.444 ; v1@43.75,207.975 cw(c43.75,207.311) 44.219,207.781 cw(c44.689,208.25) v1@44.025,208.25 ; RC216.1@43.75,209.4 v1(43.75,208.25) 44.85,207.15 46.014,207.15 46.464,207.6 48.238,207.6 48.5,207.338 UC20.174@48.5,205.8
  Bottom Layer w0.25: pad.ICT@43.449,209.199 cw(c42.724,208.474) 43.75,208.474 cw(c44.776,208.474) pad.ICT@44.051,209.199 ; v1@43.556,208.444 ccw(c43.086,208.914) 43.75,208.914 ccw(c44.414,208.914) v1@43.944,208.444 ; v1(43.75,208.25) pad.ICT@43.75,209.75
BUS+: CA70.2 CA75.2 CNBA3.1 DA6.1 pad.ICT@39.25,15.75 RA110.2 RA125.1 RA173.2 TA1.8 | length 17.3
  Top Layer w1: RA125.1@22.7,20.75 26.25,20.75 ; 27.5,22 26.25,20.75 ; 30.5,20.75 26.25,20.75
  Bottom Layer w1: RA173.2@22.7,20.75 26,20.75 ; 27.25,21.75 26.25,20.75 ; 28.5,20.75 26,20.75 ; 26,20.75 26.25,20.75 ; 26,20.75 26.25,20.75
  other v2: 49.5,10.5 49.5,12 52.25,12.25 50.75,12.75 54,21.5 52.5,22.25 55.75,22.25 52.5,24 55.75,24 54,24.5 30.5,26 28.25,27.5 31,27.5 28.75,29 30.5,29 36,30.25 34.75,31 35,32.5
BUS-: BUS-.1 CA5.1 CA75.1 CA79.2 CA80.2 CA85.2 CA86.2 CA87.2 CA87a.2 CA105.1 CA106.1 CA107.2 CA108.1 CA109.1 CA110.1 CA114.1 CA117.1 CA119.1 CA120.1 CNBA3.2 LA8.1 LA9.1 pad.ICT@31.1,73.25 QA8.2 QA11.2 RA122.2 RA152.1 RA153.1 RA154.1 RA164.1 RA167.1 RA169.1 RA179.1 RA185.1 TA1.2 UA12.5 UA13.4 UA20.3 | length 109.2
  Top Layer w0.5: UA12.5@23.6,70.845 25.645,70.845 CA86.2@26,71.2 26,70.25 26.5,69.75 29.5,69.75 30.7,70.95 CA85.2@30.7,71.25 31.95,70 BUS-.1@32.75,70 ; UA12.5@24.539,70.845 ccw(c24.539,72.661) CA86.2@25.823,71.377 ; CA86.2@25.823,71.023 cw(c25.396,70.596) 26,70.596 cw(c26.604,70.596) CA86.2@26.177,71.023 ; 29.982,70.232 ccw(c29.214,71) CA85.2@30.3,71 ; CA85.2@30.103,70.353 cw(c30.7,69.755) 30.7,70.6 cw(c30.7,69.031) 31.81,70.14 ; CA85.2@31.1,70.85 ccw(c32.096,71.846) BUS-.1@32.566,70.518 ; 31.66,70.29 ccw(c32.389,71.019) BUS-.1@32.733,70.047 ; v1@35.4,67.6 cw(c35.4,66.996) 35.827,67.423 ; UA13.4@35.4,68.845 35.4,67.85 36,67.25 ; v1@35.625,67.625 ccw(c36.54,68.54) RA164.1@36.635,67.249 ; RA164.1@36.471,66.96 ccw(c36,66.722) 36,67.25 ; RA164.1@36.65,67 36.4,67.25 36,67.25
  Top Layer w1: v1@12.179,71.679 ccw(c12.612,72.112) 12.612,71.5 ; v1(12.25,71.75) 12.5,71.5 CA106.1@13.95,71.5 ; v1(12.25,76.5) CA105.1@13.95,76.5 ; QA11.2@21.75,78.405 23.045,78.405 CA120.1@23.2,78.25 ; QA11.2@22.155,78.405 v1(23.25,79.5) CA120.1@23.25,78.3 ; RA167.1@36.2,77.9 v1(36.2,79.2) 37.25,78.15 38.3,78.15 ; 36.2,78.5 38.65,78.5 ; RA167.1@36.25,77.85 38,77.85 ; UA20.3@38,82.87 v1(38,84.5) ; QA8.2@39.5,78.5 38.65,78.5 ; QA8.2@39.75,74.9 QA8.2@39.75,77.4 ; QA8.2@39.75,76.1 38,77.85 ; CA109.1@43,73.55 43,73.75 43.75,74.5 v1(43.75,75) ; 43.567,74.317 ccw(c42.884,75) v1@43.85,75 ; 38,77.85 38.65,78.5 ; 38,77.85 39.3,77.85 QA8.2@39.75,77.4 ; 38.65,78.5 QA8.2@39.75,77.4
  Bottom Layer w0.5: CA110.1@34.55,72.35 cw(c34.55,70.901) 35.574,71.926 ; CA110.1@34.55,73 34.55,72.95 36.55,70.95 CA117.1@36.55,70.75 ; 35.982,71.518 cw(c35.214,70.75) CA117.1@36.3,70.75 ; CA117.1@36.373,70.573 cw(c35.946,70.146) 36.55,70.146 cw(c37.154,70.146) CA117.1@36.727,70.573 ; RA179.1@36.55,69.55 CA117.1@36.55,71 ; 36.55,69.904 ccw(c37.204,69.904) RA179.1@36.741,69.441
  Bottom Layer w1: v1(12.25,71.75) 15,71.75 15.5,72.25 CA119.1@15.5,73.95 RA185.1@16.95,73.95 ; CA108.1@24.5,71.5 CA107.2@24.5,73.2 ; CA108.1@24.55,71.5 30.25,71.5 ; 30.7,71.95 ccw(c29.748,72.902) pad.ICT@31.052,73.238 ; 30.95,71.5 30.25,71.5 ; 31.1,72.35 30.25,71.5 ; CA87.2@31.77,77.25 31.1,76.58 RA122.2@31.1,75.25 31.1,73.9 ; BUS-.1@32.75,70 31.1,71.65 31.1,72.6 ; CA110.1@34.55,73.25 31.75,73.25 ; v1(36.2,79.2) 36.2,78 CA114.1@36.45,77.75 ; RA169.1@48.85,76.5 48.85,74.9 50.02,73.73 CA80.2@50.02,72.75 49.3,72.03 CA79.2@49.3,70.75 ; 48.986,74.764 cw(c46.971,72.75) CA80.2@49.82,72.75 ; CA79.2@49.3,70.624 cw(c52.015,70.624) CA80.2@50.157,72.604 ; 31.1,72.6 31.1,73.9 ; 31.1,72.6 31.75,73.25 ; 31.1,73.9 31.75,73.25 ; RA122.2@31.1,75.427 cw(c33.278,75.427) 31.738,76.967 ccw(c33.278,75.427) RA122.2@31.1,75.427
  other v1: 35.4,67.75
  other v2: 26.5,2 27.75,2 29.25,2 31,2 32.75,2 29.25,3.5 31,5 29.5,6.5 59.75,10 61.5,10 62,11.25 59.75,12.5 61.5,12.5 13.25,29.75 14.5,29.75 15.75,29.75 13.25,31 14.5,31 15.75,31 13.25,32.25 52.8,52.25 55.55,52.25 52.8,53.75 55.55,53.75 46,61.75 47.5,61.75 49,61.75 46,63 47.5,63 49,63 46,64.25 47.5,64.25 49,64.25 43.5,84 45,84 46.5,84
  other v3: 44.25,83 45.75,83
  other v4: 26.5,3.5 27.75,3.5 31,3.5 32.75,3.5 26.5,5 27.75,5 26.5,6.5 27.75,6.5
BUSOVP/PVOCP_OFF: pad.ICT@24.871,198.129 QC42.3 RC298.1 UC2.19 | length 30.4
  Top Layer w0.25: v1@25.475,197.25 cw(c24.811,197.25) 25.281,196.781 cw(c25.75,196.311) v1@25.75,196.975 ; v1(25.75,197.25) 25.25,196.75 25.25,195.5 26.396,194.354 28.604,194.354 29.025,194.775 30.125,194.775 RC298.1@30.943,195.593 ; 26.295,194.455 ccw(c26.479,194.64) UC2.19@26.479,194.379 ; 30.46,195.11 cw(c31.1,194.47) RC298.1@31.1,195.375 ; 30.581,195.231 ccw(c30.111,195.7) RC298.1@30.775,195.7
  Bottom Layer w0.25: pad.ICT@24.871,197.704 cw(c24.871,196.678) 25.596,197.404 cw(c26.322,198.129) pad.ICT@25.296,198.129 ; v1@25.475,197.25 ccw(c24.811,197.25) 25.281,197.719 ccw(c25.75,198.189) v1@25.75,197.525 ; 25.662,209.25 cw(c25.662,208.092) QC42.3@26.48,208.911 ; v1(25.75,197.25) 24.25,198.75 24.25,208.75 24.75,209.25 26.433,209.25 QC42.3@26.715,208.968 ; 26.165,209.25 ccw(c26.165,209.696) QC42.3@26.48,209.381 ; QC42.3@26.265,209.25 cw(c26.265,208.696) QC42.3@26.657,209.088
DSP-COM-CNTL1: CNC25.10 RC621.2 | length 127.9
  Top Layer w0.3: v1(131.75,20) v1(135,20) ; v1@131.927,19.823 cw(c132.354,19.396) 132.354,20 cw(c132.354,20.604) v1@131.927,20.177 ; v1@134.823,19.823 ccw(c134.396,19.396) 134.396,20 ccw(c134.396,20.604) v1@134.823,20.177
  Bottom Layer w0.25: 121.25,83.45 121.775,82.925 133.875,82.925
  Bottom Layer w0.3: CNC25.10@107.54,6.095 cw(c107.54,4.465) 108.692,5.618 cw(c109.845,6.77) CNC25.10@108.215,6.77 ; CNC25.10@107.54,6.395 cw(c107.54,5.49) 108.18,6.13 cw(c108.82,6.77) CNC25.10@107.915,6.77 ; CNC25.10@107.54,6.77 108.765,5.545 108.765,3.085 109.5,2.35 117.772,2.35 120.15,4.728 120.15,10.067 130.083,20 v1(131.75,20) ; RC621.2@121.038,84.188 cw(c120.526,83.676) 121.25,83.676 cw(c121.974,83.676) RC621.2@121.462,84.188 ; 121.25,83.45 RC621.2@121.25,84.4 ; v1@131.573,19.823 ccw(c131.146,19.396) 131.146,20 ccw(c131.146,20.604) v1@131.573,20.177 ; 133.9,82.9 133.95,82.85 135.75,81.05 135.75,20.75 v1(135,20) ; v1@135,20.25 ccw(c135,20.854) 135.427,20.427 ccw(c135.854,20) v1@135.25,20
DSP-STATE: pad.ICT@101.5,181 RC662.2 UC73.67 UC643.11 | length 107.1
  Top Layer w0.25: UC643.11@88.75,106.5 UC643.11@89.6,106.5 ; RC662.2@92.25,106.5 93.3,105.45 95,105.45 96,106.45 96,111.114 97.6,112.714 97.6,136.873 99.1,138.373 99.1,148.916 102.902,152.717 102.902,157.717 101.75,158.868 101.75,160.796 v1(102.5,161.546) ; RC662.2@92.4,106.125 cw(c92.4,105.582) 92.784,105.966 ; RC662.2@92.725,106.45 ccw(c93.751,106.45) 93.026,105.724 ; UC73.67@99.75,178.55 99.75,180.75 v1(100,181) ; 99.75,179.733 cw(c101.267,179.733) v1@100.194,180.806 ; 99.75,180.336 cw(c100.664,180.336) v1@100.018,180.982 ; v1@102.225,161.546 cw(c101.561,161.546) 102.031,161.076 cw(c102.5,160.607) v1@102.5,161.271
  Top Layer w0.5: UC643.11@89.6,106.5 92.15,106.5 RC662.2@92.2,106.55 ; RC662.2@92.259,106.359 ccw(c91.917,106.017) 91.917,106.5 ccw(c91.917,106.983) RC662.2@92.259,106.641
  Bottom Layer w0.25: v1(100,181) 105.25,181 107.25,179 107.25,166.296 v1(102.5,161.546) ; v1@100.194,180.806 cw(c100.664,180.336) 100.664,181 cw(c100.664,181.664) v1@100.194,181.194 ; pad.ICT@101.199,180.699 ccw(c100.474,179.974) 100.474,181 ccw(c100.474,182.026) pad.ICT@101.199,181.301 ; pad.ICT@101.801,180.699 cw(c102.526,179.974) 102.526,181 cw(c102.526,182.026) pad.ICT@101.801,181.301 ; v1@102.5,161.821 ccw(c102.5,162.484) 102.969,162.015 ccw(c103.439,161.546) v1@102.775,161.546
DSP-STATETOARM: CNC25.8 RC611.1 UC64.4 | length 141
  Top Layer w0.3: v1(131.75,22.25) v1(134.85,22.25) ; v1@131.927,22.073 cw(c132.354,21.646) 132.354,22.25 cw(c132.354,22.854) v1@131.927,22.427 ; v1@134.673,22.073 ccw(c134.246,21.646) 134.246,22.25 ccw(c134.246,22.854) v1@134.673,22.427
  Top Layer w0.5: UC64.4@101.523,85.353 cw(c100.925,84.755) 101.77,84.755 cw(c102.615,84.755) UC64.4@102.017,85.353 ; RC611.1@101.77,83.83 UC64.4@101.77,86 ; 101.77,84.476 ccw(c102.526,84.476) RC611.1@101.991,83.941 ; RC611.1@101.85,83.5 v1(103,83.5) ; RC611.1@101.991,83.841 ccw(c102.816,84.666) v1@102.816,83.5
  Bottom Layer w0.25: 119.6,80.7 120.475,81.575 131.3,81.575 131.525,81.575 135.2,77.9
  Bottom Layer w0.3: v1@103,83.25 cw(c103,82.646) 103.427,83.073 cw(c103.854,83.5) v1@103.25,83.5 ; v1(103,83.5) 103.75,82.75 113.25,82.75 114.481,81.519 115.3,80.7 119.6,80.7 ; CNC25.8@104.586,7.303 ccw(c103.927,8.15) 105,8.15 ; CNC25.8@105,6.77 105,8.15 ; CNC25.8@105.414,7.303 cw(c106.073,8.15) 105,8.15 ; v1@131.573,22.073 ccw(c131.146,21.646) 131.146,22.25 ccw(c131.146,22.854) v1@131.573,22.427 ; v1(131.75,22.25) 130.778,22.25 117.328,8.8 105.65,8.8 105,8.15 ; v1@134.673,22.427 ccw(c134.246,22.854) 134.85,22.854 ccw(c135.454,22.854) v1@135.027,22.427 ; v1(134.85,22.25) 134.85,23.989 135.2,24.339 135.2,77.9
DSP_BUSOVP: CC140.2 CC288.1 DC9.2 DC43.2 pad.ICT@60.25,218 RC110.2 TP15.1 UC20.26 UC626.1 UC626.7 | length 152
  Top Layer w0.25: v1@35.225,218.75 cw(c34.561,218.75) 35.031,218.281 cw(c35.5,217.811) v1@35.5,218.475 ; v1@35.5,219.025 ccw(c35.5,219.689) 35.969,219.219 ccw(c36.439,218.75) v1@35.775,218.75 ; CC140.2@36.035,195.015 ccw(c35.395,195.655) 36.3,195.655 ccw(c37.205,195.655) CC140.2@36.565,195.015 ; CC140.2@36.3,194.375 cw(c36.3,193.59) 36.855,194.145 ; CC140.2@36.675,194.75 ccw(c37.701,194.75) 36.976,194.024 ; UC20.26@45.7,191.5 41.75,191.5 41.25,192 37.986,192 37.305,192.682 37.305,193.695 36.3,194.7 CC140.2@36.3,194.75 36.3,200.743 34.8,202.243 34.8,218.05 v1(35.5,218.75) 36,219.25 56.25,219.25 v1(56.75,219.75) ; v1@56.475,219.75 cw(c55.811,219.75) 56.281,219.281 cw(c56.75,218.811) v1@56.75,219.475 ; v1(61.75,218) 83.5,218 87.2,218 88,218 88.85,217.15 ; v1@61.944,217.806 cw(c62.414,217.336) 62.414,218 cw(c62.414,218.664) v1@61.944,218.194 ; 79.913,218 cw(c79.913,214.663) TP15.1@82.273,217.023 ; 80.517,218 cw(c80.517,215.267) TP15.1@82.449,217.199 ; 81.12,218 cw(c81.12,215.87) TP15.1@82.626,217.376 ; 81.724,218 cw(c81.724,216.474) TP15.1@82.803,217.553 ; 81.75,218 82.25,217.5 TP15.1@82.75,217.5 83.25,217.5 83.75,218 cw(c83.477,218.273) TP15.1@83.212,217.992 ; TP15.1@82.697,217.553 cw(c83.776,216.474) 83.776,218 ; TP15.1@82.874,217.376 cw(c84.38,215.87) 84.38,218 ; TP15.1@83.041,217.81 ccw(c83.3,218.085) 83.568,217.818 ; TP15.1@83.051,217.199 cw(c84.983,215.267) 84.983,218 ; TP15.1@83.227,217.023 cw(c85.587,214.663) 85.587,218 ; TP15.1@83.425,217.5 cw(c83.847,217.5) 83.549,217.799
  Top Layer w0.5: DC43.2@30,217 30.75,217.75 ; DC43.2@30.029,217.498 ccw(c30.129,218.371) 30.75,217.75 ; 31.276,217.75 ccw(c31.276,218.524) 31.823,217.977 ccw(c31.396,218.404) 32,218.404 ccw(c32.604,218.404) CC288.1@32.177,217.977 ; CC288.1@32,217.8 v1(32,219) ; CC288.1@32.05,217.75 30.75,217.75 ; RC110.2@88.709,216.441 ccw(c88.367,216.783) 88.85,216.783 ccw(c89.333,216.783) RC110.2@88.991,216.441 ; 88.85,217.15 RC110.2@88.85,216.25 91,216.25 v1(91.65,215.6) UC626.1@91.65,214.405 93.345,214.405 94.615,213.135 UC626.7@96.85,213.135 ; RC110.2@88.991,216.109 cw(c89.333,215.767) 89.333,216.25 cw(c89.333,216.733) RC110.2@88.991,216.391
  Bottom Layer w0.25: v1(32,219) 35.25,219 v1(35.5,218.75) ; v1@32.194,218.806 cw(c32.664,218.336) 32.664,219 cw(c32.664,219.664) v1@32.194,219.194 ; 34.233,219 cw(c34.233,217.483) v1@35.306,218.556 ; 34.836,219 cw(c34.836,218.086) v1@35.482,218.732 ; v1@56.75,219.475 cw(c56.75,218.811) 57.219,219.281 cw(c57.689,219.75) v1@57.025,219.75 ; v1(56.75,219.75) 58.5,218 v1(61.75,218) ; pad.ICT@59.949,217.699 ccw(c59.224,216.974) 59.224,218 ccw(c59.224,219.026) pad.ICT@59.949,218.301 ; pad.ICT@60.551,217.699 cw(c61.276,216.974) 61.276,218 cw(c61.276,219.026) pad.ICT@60.551,218.301 ; v1@61.556,217.806 ccw(c61.086,217.336) 61.086,218 ccw(c61.086,218.664) v1@61.556,218.194
  Bottom Layer w0.5: v1(91.65,215.6) 92.95,215.6 DC9.2@94,214.55 ; 93.061,215.489 ccw(c94,216.428) DC9.2@94,215.1 ; DC9.2@93.303,215.247 cw(c92.705,214.65) DC9.2@93.55,214.65
DSP_OUTOCP: CC136.2 pad.ICT@70.25,153 UC20.21 UC50.3 UC50.5 UC50.9 | length 108.7
  Top Layer w0.25: v1@41.5,194.725 cw(c41.5,194.061) 41.969,194.531 cw(c42.439,195) v1@41.775,195 ; v1(41.5,195) 42.5,194 UC20.21@45.7,194
  Top Layer w0.5: UC50.5@68.65,153.73 69.98,153.73 v1(70.5,154.25) 70.5,155.75 69.98,156.27 UC50.3@68.65,156.27 ; UC50.5@69.45,153.78 ccw(c69.45,155.18) v1@70.44,154.19 ; UC50.3@69.45,156.22 cw(c69.45,154.82) 70.44,155.81 ; UC50.3@69.462,156.222 cw(c69.663,155.423) 70.245,156.005 ; v1(71.25,152.46) UC50.9@73.85,152.46
  Bottom Layer w0.25: CC136.2@39.925,194.75 cw(c39.02,194.75) 39.66,194.11 cw(c40.3,193.47) CC136.2@40.3,194.375 ; CC136.2@40.3,194.75 39.375,193.825 33.525,193.825 31.25,191.55 31.25,164.386 32.586,163.05 52.727,163.05 56.577,159.2 65.55,159.2 v1(70.5,154.25) ; CC136.2@40.3,195 v1(41.5,195) ccw(c41.5,193.911) CC136.2@40.607,194.535 ; CC136.2@40.402,194.678 cw(c41.02,194.246) 41.02,195 ; v1@41.306,194.806 ccw(c40.836,194.336) 40.836,195 ccw(c40.836,195.664) v1@41.306,195.194 ; v1@70.225,154.25 ccw(c69.561,154.25) 70.031,154.719 ccw(c70.5,155.189) v1@70.5,154.525
  Bottom Layer w0.5: pad.ICT@70.047,153.221 ccw(c69.105,154.25) v1(70.5,154.25) 70.5,153.21 v1(71.25,152.46) ; pad.ICT@70.264,152.7 cw(c70.34,151.09) v1@71.214,152.445
DSP_PV1OCP: CC137.2 CC268.1 pad.ICT@41.5,197.25 RC449.2 UC20.24 UC622.2 | length 65.6
  Top Layer w0.25: UC622.2@21.4,180.29 22.79,180.29 23,180.5 23,194.775 22.275,195.5 v1(22.25,195.5) ; v1@22.25,195.225 cw(c22.25,194.5) 22.763,195.013 ; UC622.2@22.324,180.166 cw(c22.622,179.868) 22.622,180.29 cw(c22.622,180.712) UC622.2@22.324,180.414 ; v1@22.525,195.5 ccw(c23.128,195.5) 22.702,195.074 ; CC137.2@40.18,194.713 ccw(c40.871,194.925) 40.871,194.203 ; CC137.2@40.3,194.75 40.3,194.7 40.797,194.203 41.547,194.203 ; CC137.2@40.343,194.377 cw(c40.403,193.859) 40.772,194.228 cw(c41.077,194.533) CC137.2@40.661,194.649 ; CC137.2@40.42,194.787 ccw(c41.209,195.029) 41.209,194.203 ; CC137.2@40.659,194.86 ccw(c41.547,195.132) 41.547,194.203 ; v1@42.725,192.75 ccw(c42.061,192.75) 42.531,193.219 ccw(c43,193.689) v1@43,193.025 ; v1(43,192.75) 41.547,194.203 ; v1@43.25,192.5 UC20.24@45.7,192.5
  Top Layer w0.5: v1@19.69,180.29 v1(19.75,180.29) UC622.2@21.4,180.29
  Bottom Layer w0.25: v1(22.25,195.5) 32.338,195.5 33.12,196.281 41.5,196.281 ; v1@22.444,195.306 cw(c22.914,194.836) 22.914,195.5 cw(c22.914,196.164) v1@22.444,195.694 ; pad.ICT@41.212,196.937 cw(c40.609,196.281) 41.5,196.281 ; 41.282,196.281 41.5,196.5 ; pad.ICT@41.5,197.25 41.5,196.5 ; 41.718,196.281 41.5,196.5 ; pad.ICT@41.788,196.937 ccw(c42.391,196.281) 41.5,196.281 ; v1@42.806,192.944 ccw(c42.336,193.414) 43,193.414 ccw(c43.664,193.414) v1@43.194,192.944 ; v1(43,192.75) 43,195.636 42.355,196.281 41.5,196.281 ; 41.5,196.281 41.5,196.5
  Bottom Layer w0.5: v1@19.69,180.29 v1(19.75,180.29) 20.86,180.29 20.86,178.84 CC268.1@20.95,178.75 ; 20.393,180.29 ccw(c20.393,180.807) RC449.2@20.759,180.441 ; 20.441,180.29 cw(c20.441,179.841) RC449.2@20.759,180.159 ; 20.86,179.571 ccw(c21.771,179.571) CC268.1@21.127,178.927 ; 20.86,179.621 cw(c21.479,179.621) RC449.2@21.041,180.059
DSP_PV2OCP: CC139.2 CC269.1 pad.ICT@30.25,194.25 RC450.2 UC20.25 UC622.1 | length 62.2
  Top Layer w0.25: UC622.1@22,181.56 22.25,181.81 v1(22.25,194.5) ; v1@22.056,194.306 cw(c21.586,193.836) 22.25,193.836 cw(c22.914,193.836) v1@22.444,194.306 ; UC622.1@22.076,181.684 ccw(c21.657,182.103) 22.25,182.103 ; 22.25,181.862 ccw(c22.502,181.862) UC622.1@22.324,181.684 ; CC139.2@40.3,193 40.55,192.75 v1(41.5,192.75) ; CC139.2@40.402,193.072 ccw(c41.02,193.504) 41.02,192.75 ; CC139.2@40.607,193.215 ccw(c41.5,193.839) v1(41.5,192.75) ; v1@41.306,192.556 ccw(c40.836,192.086) 40.836,192.75 ccw(c40.836,193.414) v1@41.306,192.944 ; v1@41.5,192.475 cw(c41.5,191.811) 41.969,192.281 cw(c42.439,192.75) v1@41.775,192.75 ; UC20.25@45.7,192 42.25,192 v1(41.5,192.75)
  Top Layer w0.5: v1(19.75,181.56) UC622.1@21.4,181.56
  Bottom Layer w0.25: v1(22.25,194.5) 31.975,194.5 33.306,195.831 42.169,195.831 42.55,195.45 42.55,193.8 v1(41.5,192.75) ; v1@22.444,194.306 cw(c22.914,193.836) 22.914,194.5 cw(c22.914,195.164) v1@22.444,194.694 ; 28.62,194.5 cw(c28.62,192.62) pad.ICT@29.949,193.949 ; 29.224,194.5 cw(c29.224,193.224) pad.ICT@30.126,194.126 ; pad.ICT@30.374,194.126 cw(c31.276,193.224) 31.276,194.5 ; pad.ICT@30.551,193.949 cw(c31.88,192.62) 31.88,194.5 ; v1@41.5,193.025 ccw(c41.5,193.689) 41.969,193.219 ccw(c42.439,192.75) v1@41.775,192.75
  Bottom Layer w0.5: v1(19.75,181.56) 20.71,181.56 RC450.2@20.9,181.75 20.95,181.8 CC269.1@20.95,183.25 ; v1@20.079,181.56 ccw(c20.079,182.521) RC450.2@20.759,181.841 ; RC450.2@20.759,181.941 ccw(c20.296,182.404) 20.95,182.404 ; CC269.1@20.773,183.073 cw(c20.346,182.646) 20.95,182.646 cw(c21.554,182.646) CC269.1@21.127,183.073
EARTH: RC195.2 SC6.1
EMU1: CC176.2 CNC3.14 RC289.2 UC20.86 | length 46.7
  Top Layer w0.25: CNC3.14@55.393,157.747 ccw(c54.24,158.9) 55.87,158.9 ccw(c57.5,158.9) CNC3.14@56.347,157.747 ; CNC3.14@55.569,157.571 ccw(c54.844,158.296) 55.87,158.296 ccw(c56.896,158.296) CNC3.14@56.171,157.571 ; CNC3.14@55.87,157.27 55.87,162.776 60.675,167.581 60.675,171.334 62.741,173.4 63.924,173.4 68,177.476 UC20.86@68,180.7
  Bottom Layer w0.25: CNC3.14@55.87,157.27 56.85,158.25 ; CNC3.14@55.921,157.692 ccw(c56.004,158.37) 56.487,157.887 ccw(c56.97,157.404) CNC3.14@56.292,157.321 ; CNC3.14@55.952,157.94 ccw(c56.083,159.017) 56.85,158.25 ; CNC3.14@56.54,157.352 cw(c57.617,157.483) 56.85,158.25 ; 58.96,157.64 ccw(c59.6,158.28) RC289.2@59.6,157.375 ; 59.081,157.519 cw(c58.611,157.05) RC289.2@59.275,157.05 ; RC289.2@59.83,156.77 cw(c60.385,156.215) 60.385,157 cw(c60.385,157.785) RC289.2@59.83,157.23 ; CC176.2@60.935,156.735 ccw(c60.295,156.095) 60.295,157 ccw(c60.295,157.905) CC176.2@60.935,157.265 ; CC176.2@61.2,157 RC289.2@59.6,157 58.35,158.25 56.85,158.25
EMUO: CC175.2 CNC3.13 RC287.1 UC20.85 | length 47.3
  Top Layer w0.25: 54.5,160.205 54.5,159.75 ; CNC3.13@55.195,154.73 ccw(c53.565,154.73) 54.718,155.882 ccw(c55.87,157.035) CNC3.13@55.87,155.405 ; CNC3.13@55.445,154.73 ccw(c54.419,154.73) 55.144,155.456 ccw(c55.87,156.181) CNC3.13@55.87,155.155 ; CNC3.13@55.87,154.73 54.5,156.1 54.5,159.75 ; UC20.85@67.5,180.7 67.5,177.612 63.738,173.85 62.554,173.85 60.225,171.521 60.225,167.768 54.5,162.043 54.5,159.75
  Bottom Layer w0.25: CNC3.13@55.87,154.73 56.6,154 58.35,154 RC287.1@59.6,155.25 CC175.2@61.2,155.25 ; 58.96,154.61 cw(c59.6,153.97) RC287.1@59.6,154.875 ; 59.081,154.731 ccw(c58.611,155.2) RC287.1@59.275,155.2 ; RC287.1@59.83,155.02 cw(c60.385,154.465) 60.385,155.25 cw(c60.385,156.035) RC287.1@59.83,155.48 ; CC175.2@60.935,154.985 ccw(c60.295,154.345) 60.295,155.25 ccw(c60.295,156.155) CC175.2@60.935,155.515